# Altium PCB ups_lead_acid_electgpl_v1.0(1).PcbDoc (part 2 of 2)
Units mm, origin at the board's own origin, x right, y up, seen from the top; angles counter-clockwise.
Board outline 152.4 x 101.6 mm, 18 copper layers (F.Cu, F.Mask, B.Cu, B.Mask, F.SilkS, B.SilkS, F.Adhes, B.Adhes, F.Paste, B.Paste, Dwgs.User, Cmts.User, Eco1.User, Eco2.User, Edge.Cuts, Margin, B.CrtYd, F.CrtYd); 78 components, 42 nets, 240 pads, 288 vias.
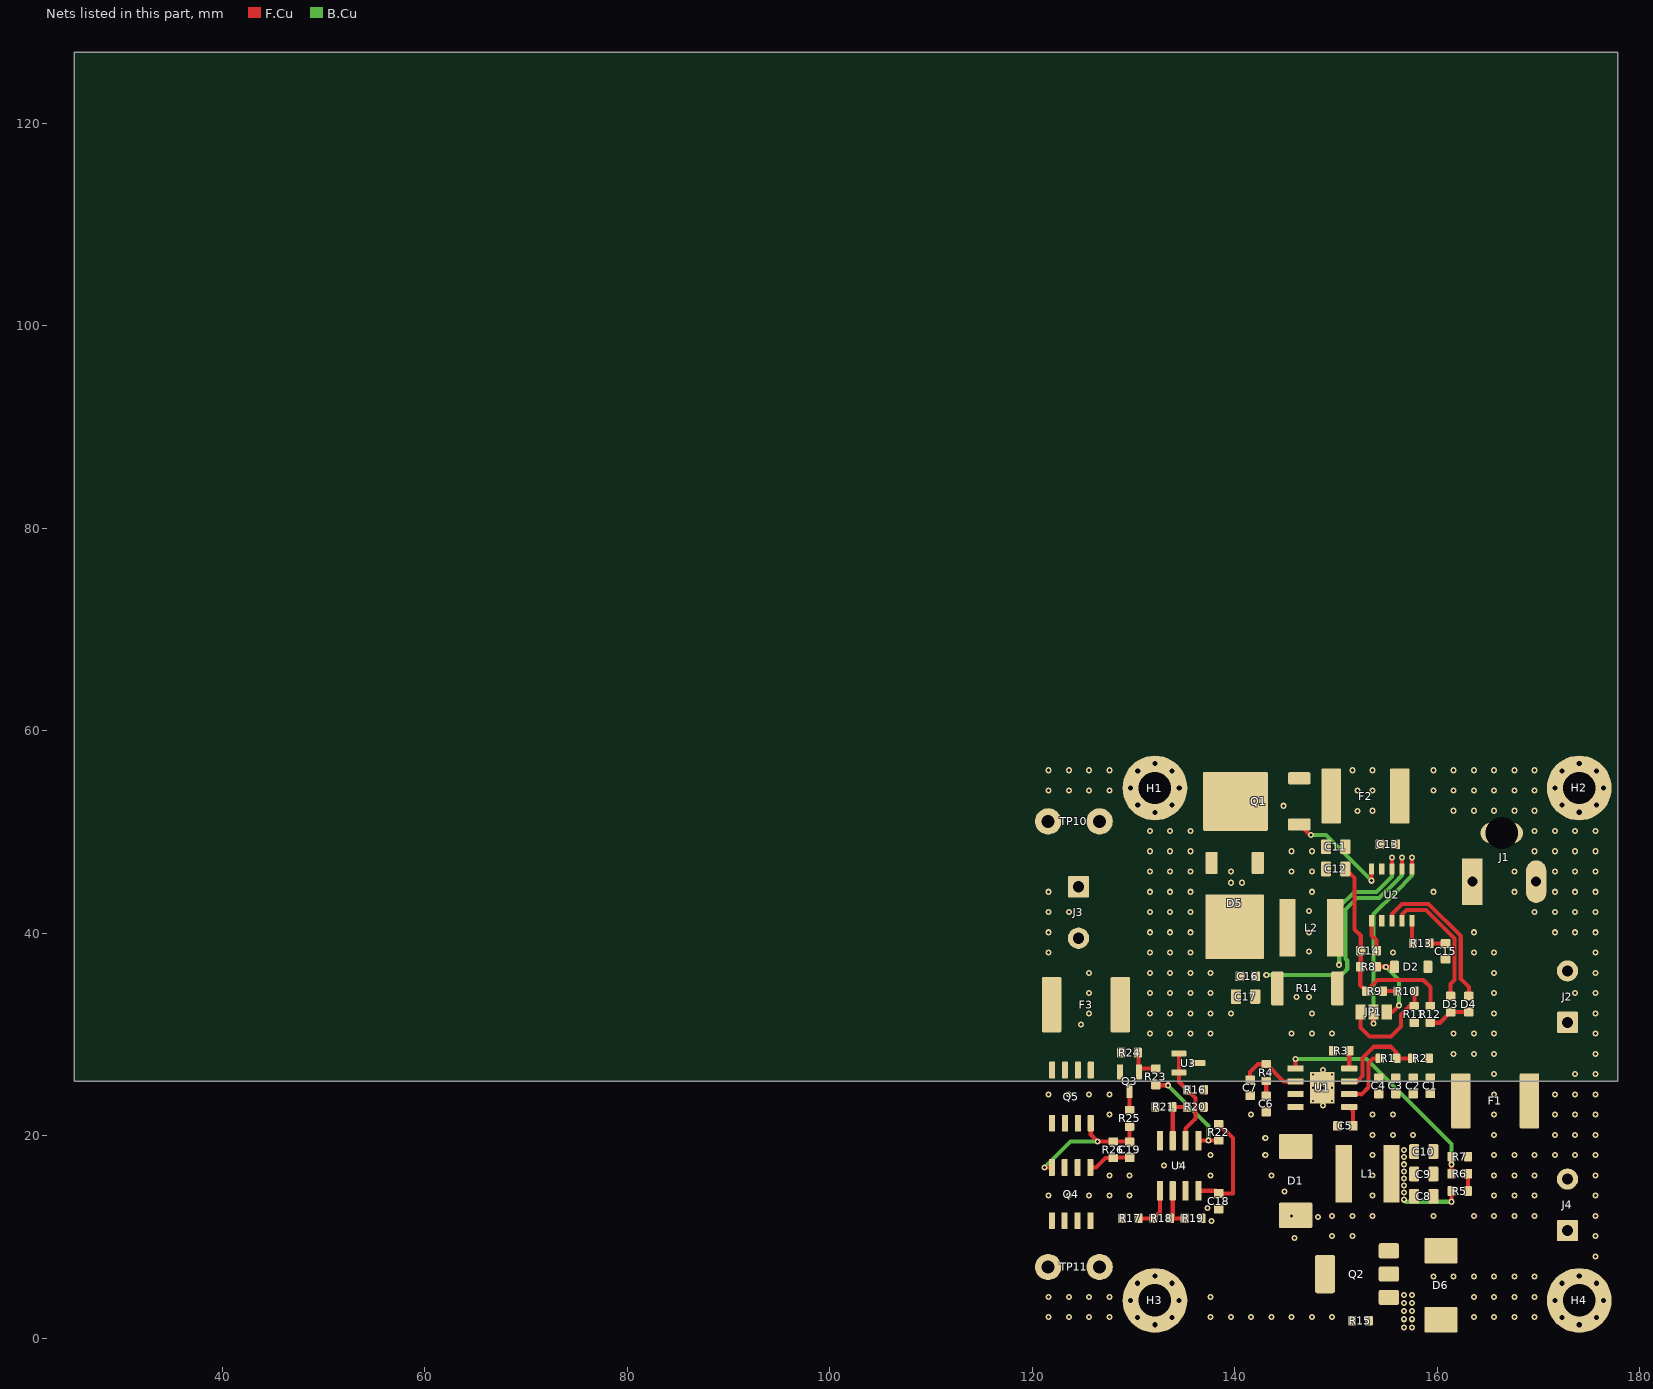
[diagram p8: the nets of this part, all layers, seen from the top]

## Part data (continued)
L1 L2: library part L_Taiyo-Yuden_NR-60xx, "Inductor, Taiyo Yuden, NR series, Taiyo-Yuden_NR-60xx, 6.0mmx6.0mm", LCSC=C360734, MFR P/N=VLS6045EX-100M, ki_fp_filters="Choke_* *Coil* Inductor_* L_*"
  L1: Description="Inductor with ferrite core", Absolute minimum=5A, Reference MFG P/N=C2849537
  L2: Internal P/N=L10U-10-12_12_6
Q1: library part TO-252-2, "TO-252/DPAK SMD package, http://www.infineon.com/cms/en/product/packages/PG-TO252/PG-TO252-3-1/", LCSC=C397952, MFR P/N=DMP4051LK3-13, Datasheet=http://www.jaolen.com/images/pdf/QM6015D.pdf, Description="-35A Id, -60V Vds, P-Channel Power MOSFET, 25mOhm Ron, 25.0nC Qg (typ), TO252", ki_fp_filters=TO?252*
Q2: library part SOT-223-3_TabPin2, "module CMS SOT223 4 pins", LCSC Part=C154901, LCSC=C558214, MFR P/N=NTF6P02T3G-VB, Datasheet=https://www.lcsc.com/datasheet/lcsc_datasheet_1808280023_Diodes-Incorporated-DMP6023LE-13_C154901.pdf, Description="60V 2W 28mΩ@10V,5A 3V@250uA 1 Piece P-Channel SOT-223-4 MOSFETs ROHS"
Q3: library part SOT-23, "SOT, 3 Pin (JEDEC TO-236 Var AB https://www.jedec.org/document_search?search_api_views_fulltext=TO-236), generated with kicad-footprint-generator ipc_gullwing_generator.py", LCSC=C65189, MFR P/N=2N7002,215, Datasheet=https://www.onsemi.com/pub/Collateral/NDS7002A-D.PDF, Description="0.115A Id, 60V Vds, N-Channel MOSFET, SOT-23", ki_fp_filters=SOT?23*
Q4 Q5: library part SOP-8_3.9x4.9mm_P1.27mm, "SOP, 8 Pin (http://www.macronix.com/Lists/Datasheet/Attachments/7534/MX25R3235F,%20Wide%20Range,%2032Mb,%20v1.6.pdf#page=79), generated with kicad-footprint-generator ipc_gullwing_generator.py", LCSC=C2841482, MFR P/N=AO4407A, Datasheet=http://www.infineon.com/dgdl/irf7404.pdf?fileId=5546d462533600a4015355fa2b5b1b9e, Description="-6.7A Id, -20V Vds, P-Channel HEXFET Power MOSFET, SO-8", ki_fp_filters=SOIC*3.9x4.9mm*P1.27mm*
R1: library part R_0603_1608Metric, "Resistor SMD 0603 (1608 Metric), square (rectangular) end terminal, IPC-7351 nominal, (Body size source: IPC-SM-782 page 72, https://www.pcb-3d.com/wordpress/wp-content/uploads/ipc-sm-782a_amendment_1_and_2.pdf), generated with kicad-footprint-generator", LCSC=C23175, MFR P/N=0603WAF4423T5E, Description="Resistor, small US symbol", Absolute minimum="442k 0402", Reference MFG P/N=C3016035, ki_fp_filters=R_*
R2: library part R_0603_1608Metric, "Resistor SMD 0603 (1608 Metric), square (rectangular) end terminal, IPC-7351 nominal, (Body size source: IPC-SM-782 page 72, https://www.pcb-3d.com/wordpress/wp-content/uploads/ipc-sm-782a_amendment_1_and_2.pdf), generated with kicad-footprint-generator", LCSC=C2930136, MFR P/N=FRC0603F9092TS, Description="Resistor, small US symbol", Absolute minimum="90k9 0402", Reference MFG P/N=C26989, ki_fp_filters=R_*
R3: library part R_0603_1608Metric, "Resistor SMD 0603 (1608 Metric), square (rectangular) end terminal, IPC-7351 nominal, (Body size source: IPC-SM-782 page 72, https://www.pcb-3d.com/wordpress/wp-content/uploads/ipc-sm-782a_amendment_1_and_2.pdf), generated with kicad-footprint-generator", LCSC=C7467321, MFR P/N=FRC0603F2433TS, Description="Resistor, small US symbol", Absolute minimum="243k 0402", Reference MFG P/N=C2998149, ki_fp_filters=R_*
R4: library part R_0603_1608Metric, "Resistor SMD 0603 (1608 Metric), square (rectangular) end terminal, IPC-7351 nominal, (Body size source: IPC-SM-782 page 72, https://www.pcb-3d.com/wordpress/wp-content/uploads/ipc-sm-782a_amendment_1_and_2.pdf), generated with kicad-footprint-generator", LCSC=C2933158, MFR P/N=FRC0603F1692TS, Description="Resistor, small US symbol", Absolute minimum="16k9 0402", Reference MFG P/N=C2929989, ki_fp_filters=R_*
R5: library part R_0603_1608Metric, "Resistor SMD 0603 (1608 Metric), square (rectangular) end terminal, IPC-7351 nominal, (Body size source: IPC-SM-782 page 72, https://www.pcb-3d.com/wordpress/wp-content/uploads/ipc-sm-782a_amendment_1_and_2.pdf), generated with kicad-footprint-generator", LCSC=C2930110, MFR P/N=FRC0603F49R9TS, Description="Resistor, small US symbol", Absolute minimum="49R9 0402", Reference MFG P/N=C25120, ki_fp_filters=R_*
R6: library part R_0603_1608Metric, "Resistor SMD 0603 (1608 Metric), square (rectangular) end terminal, IPC-7351 nominal, (Body size source: IPC-SM-782 page 72, https://www.pcb-3d.com/wordpress/wp-content/uploads/ipc-sm-782a_amendment_1_and_2.pdf), generated with kicad-footprint-generator", LCSC=C2907153, MFR P/N="FRC0603J333 TS", Description="Resistor, small US symbol", Absolute minimum="53k6 0402", Reference MFG P/N=C5153961, ki_fp_filters=R_*
R7: library part R_0603_1608Metric, "Resistor SMD 0603 (1608 Metric), square (rectangular) end terminal, IPC-7351 nominal, (Body size source: IPC-SM-782 page 72, https://www.pcb-3d.com/wordpress/wp-content/uploads/ipc-sm-782a_amendment_1_and_2.pdf), generated with kicad-footprint-generator", LCSC=C2907117, MFR P/N="FRC0603J222 TS", Description="Resistor, small US symbol", Absolute minimum="10k2 0402", Reference MFG P/N=C3015976, ki_fp_filters=R_*
R8 R11: library part R_0603_1608Metric, "Resistor SMD 0603 (1608 Metric), square (rectangular) end terminal, IPC-7351 nominal, (Body size source: IPC-SM-782 page 72, https://www.pcb-3d.com/wordpress/wp-content/uploads/ipc-sm-782a_amendment_1_and_2.pdf), generated with kicad-footprint-generator", LCSC=C2907088, MFR P/N="FRC0603J104 TS", Internal P/N=R100K-0603-1, ki_fp_filters=R_*
  R11: Aux=Rc
R9: library part R_0603_1608Metric, "Resistor SMD 0603 (1608 Metric), square (rectangular) end terminal, IPC-7351 nominal, (Body size source: IPC-SM-782 page 72, https://www.pcb-3d.com/wordpress/wp-content/uploads/ipc-sm-782a_amendment_1_and_2.pdf), generated with kicad-footprint-generator", LCSC=C2907003, MFR P/N=FRC0603F1004TS, Aux=Ra, Internal P/N=R1M-0603-1, ki_fp_filters=R_*
R10: library part R_0603_1608Metric, "Resistor SMD 0603 (1608 Metric), square (rectangular) end terminal, IPC-7351 nominal, (Body size source: IPC-SM-782 page 72, https://www.pcb-3d.com/wordpress/wp-content/uploads/ipc-sm-782a_amendment_1_and_2.pdf), generated with kicad-footprint-generator", LCSC=C2907029, MFR P/N=FRC0603F3603TS, Aux=Rb, Internal P/N=R360K-0603-1, ki_fp_filters=R_*
R12 R16 R22 R23 R24 R26: library part R_0603_1608Metric, "Resistor SMD 0603 (1608 Metric), square (rectangular) end terminal, IPC-7351 nominal, (Body size source: IPC-SM-782 page 72, https://www.pcb-3d.com/wordpress/wp-content/uploads/ipc-sm-782a_amendment_1_and_2.pdf), generated with kicad-footprint-generator", LCSC=C2930027, MFR P/N="FRC0603J103 TS", ki_fp_filters=R_*
  R12: Internal P/N=R10K-0603-1
  R16 R22 R23 R24 R26: Description="Resistor, small US symbol"
R13: library part R_0603_1608Metric, "Resistor SMD 0603 (1608 Metric), square (rectangular) end terminal, IPC-7351 nominal, (Body size source: IPC-SM-782 page 72, https://www.pcb-3d.com/wordpress/wp-content/uploads/ipc-sm-782a_amendment_1_and_2.pdf), generated with kicad-footprint-generator", LCSC=C2907096, MFR P/N="FRC0603J121 TS", Internal P/N=R120-0603-1, ki_fp_filters=R_*
R14: library part R_2512_6332Metric, "Resistor SMD 2512 (6332 Metric), square (rectangular) end terminal, IPC-7351 nominal, (Body size source: IPC-SM-782 page 72, https://www.pcb-3d.com/wordpress/wp-content/uploads/ipc-sm-782a_amendment_1_and_2.pdf), generated with kicad-footprint-generator", LCSC=C875871, MFR P/N=PT2512FK-7W0R12L, Internal P/N=R0.03-2512_2W-1, ki_fp_filters=R_*
R15: library part R_0603_1608Metric, "Resistor SMD 0603 (1608 Metric), square (rectangular) end terminal, IPC-7351 nominal, (Body size source: IPC-SM-782 page 72, https://www.pcb-3d.com/wordpress/wp-content/uploads/ipc-sm-782a_amendment_1_and_2.pdf), generated with kicad-footprint-generator", LCSC Part=C99198, LCSC=C2907088, MFR P/N="FRC0603J104 TS", Description="Resistor, small US symbol", ki_fp_filters=R_*
R17 R18 R19: library part R_0603_1608Metric, "Resistor SMD 0603 (1608 Metric), square (rectangular) end terminal, IPC-7351 nominal, (Body size source: IPC-SM-782 page 72, https://www.pcb-3d.com/wordpress/wp-content/uploads/ipc-sm-782a_amendment_1_and_2.pdf), generated with kicad-footprint-generator", LCSC=C2907042, MFR P/N=FRC0603F4702TS, Description="Resistor, small US symbol", ki_fp_filters=R_*
R20: library part R_0603_1608Metric, "Resistor SMD 0603 (1608 Metric), square (rectangular) end terminal, IPC-7351 nominal, (Body size source: IPC-SM-782 page 72, https://www.pcb-3d.com/wordpress/wp-content/uploads/ipc-sm-782a_amendment_1_and_2.pdf), generated with kicad-footprint-generator", LCSC=C2906995, MFR P/N=FRC0603F1502TS, Description="Resistor, small US symbol", ki_fp_filters=R_*
R21: library part R_0603_1608Metric, "Resistor SMD 0603 (1608 Metric), square (rectangular) end terminal, IPC-7351 nominal, (Body size source: IPC-SM-782 page 72, https://www.pcb-3d.com/wordpress/wp-content/uploads/ipc-sm-782a_amendment_1_and_2.pdf), generated with kicad-footprint-generator", LCSC=C2907166, MFR P/N="FRC0603J472 TS", Description="Resistor, small US symbol", ki_fp_filters=R_*
R25: library part R_0603_1608Metric, "Resistor SMD 0603 (1608 Metric), square (rectangular) end terminal, IPC-7351 nominal, (Body size source: IPC-SM-782 page 72, https://www.pcb-3d.com/wordpress/wp-content/uploads/ipc-sm-782a_amendment_1_and_2.pdf), generated with kicad-footprint-generator", LCSC=C2907091, MFR P/N="FRC0603J100 TS", Description="Resistor, small US symbol", ki_fp_filters=R_*
REF**: library part Symbol_Barrel_Polarity, "Barrel connector polarity indicator"
TP10 TP11: library part TestPoint_Bridge_Pitch5.08mm_Drill1.3mm, "wire loop as test point, pitch 5.08mm, hole diameter 1.3mm, wire diameter 1.0mm", Description="test point (alternative shape)", ki_fp_filters="Pin* Test*"
U1: library part HSOP-8-1EP_3.9x4.9mm_P1.27mm_EP2.41x3.1mm_ThermalVias, "HSOP, 8 Pin (https://www.st.com/resource/en/datasheet/l5973d.pdf), generated with kicad-footprint-generator ipc_gullwing_generator.py", LCSC=C44377, MFR P/N=TPS54360DDAR, Datasheet=http://www.ti.com/lit/ds/symlink/tps54360.pdf, Description="3.5A, Step Down DC-DC Converter with Eco-mode, 4.5-60V Input Voltage, PowerSO-8", Absolute minimum=TPS54360DDA, Reference MFG P/N=C44377, ki_fp_filters=TI*SO*PowerPAD*ThermalVias*
U2: library part SSOP-10_3.9x4.9mm_P1.00mm, "10-Lead SSOP, 3.9 x 4.9mm body, 1.00mm pitch (http://www.st.com/resource/en/datasheet/viper01.pdf)", MFR P/N=CN3767, LCSC=C81968
U3: library part SOT-23, "SOT, 3 Pin (JEDEC TO-236 Var AB https://www.jedec.org/document_search?search_api_views_fulltext=TO-236), generated with kicad-footprint-generator ipc_gullwing_generator.py", LCSC=C23892, MFR P/N=TL431AIDBZR, Datasheet=http://www.ti.com/lit/ds/symlink/tl431.pdf, Description="Shunt Regulator, SOT-23", ki_fp_filters=SOT?23*
U4: library part SOIC-8_3.9x4.9mm_P1.27mm, "SOIC, 8 Pin (JEDEC MS-012AA, https://www.analog.com/media/en/package-pcb-resources/package/pkg_pdf/soic_narrow-r/r_8.pdf), generated with kicad-footprint-generator ipc_gullwing_generator.py", LCSC=C67470, MFR P/N=LM393DR, Datasheet=http://www.ti.com/lit/ds/symlink/lm393.pdf, Description="Low-Power, Low-Offset Voltage, Dual Comparators, DIP-8/SOIC-8/TO-99-8", ki_fp_filters="SOIC*3.9x4.9mm*P1.27mm* DIP*W7.62mm* SOP*5.28x5.23mm*P1.27mm* VSSOP*3x3mm*P0.65mm* TSSOP*4.4x3mm*P0.65mm*"

## Via types
v1: diameter 0.6, hole 0.3, F.Cu to B.Cu, tented both sides, 288 vias

## Nets (pads, with @x,y where several pads share a name; then routed paths per layer and width w, separated by ;. In a path a pad name is that pad's centre, name@x,y a point inside that pad or via, vN(x,y) a via of type N, cw(c..) or ccw(c..) an arc to the next point about the centre after c; other vN are vias at no path point)
+12V: C8.2 C9.2 C10.2 D6.2 L1.2 Q2.1 R5.1 R15.2 | length 5.9
  F.Cu w0.406: R5.1@161.375,14.558 161.375,13.525 v1(161.4,13.5)
  B.Cu w0.406: v1(156.7,13.7) 156.9,13.5 v1(161.4,13.5)
  other v1: 156.7,1.1 157.5,1.1 156.7,1.9 157.5,1.9 156.7,2.7 157.5,2.7 156.7,3.5 157.5,3.5 156.7,4.3 157.5,4.3 156.7,14.4 156.7,15.1 156.7,15.8 156.7,16.5 156.7,17.2 156.7,17.9 156.7,18.6
BAT+: F3.1 J3.1 TP10.1
GND: C1.1 C2.1 C3.1 C4.1 C6.2 C7.2 C8.1 C9.1 C10.1 C11.2 C12.2 C13.2 C15.2 C16.2 C17.2 C18.2 D1.2 D2.2 D5.3 H1.1 H2.1 H3.1 H4.1 J1.2 J2.2 J3.2 J4.2 Q3.2 R2.2 R3.2 R7.2 R11.2 R15.1 R19.2 R21.2 R24.2 TP11.1 U1.7 U1.9 U2.2 U3.3 U4.4
  other v1: 121.6,2.108 123.6,2.108 125.6,2.108 127.6,2.108 137.6,2.108 139.6,2.108 141.6,2.108 143.6,2.108 145.6,2.108 147.6,2.108 149.6,2.108 163.6,2.108 165.6,2.108 167.6,2.108 169.6,2.108 121.6,4.108 123.6,4.108 125.6,4.108 127.6,4.108 131.6,4.108 137.6,4.108 163.6,4.108 165.6,4.108 167.6,4.108 169.6,4.108 173.6,4.108 159.6,6.108 161.6,6.108 163.6,6.108 165.6,6.108 167.6,6.108 169.6,6.108 175.6,8.108 145.9,9.9 149.6,10.108 151.6,10.108 175.6,10.108 137.7,11.6 148.2,12 145.6,12.108 149.6,12.108 151.6,12.108 153.6,12.108 159.6,12.108 163.6,12.108 165.6,12.108 167.6,12.108 169.6,12.108 175.6,12.108 137.3,12.9 121.6,14.108 123.6,14.108 125.6,14.108 127.6,14.108 129.6,14.108 153.6,14.108 165.6,14.108 167.6,14.108 169.6,14.108 175.6,14.108 144.9,14.5 127.6,16.108 129.6,16.108 137.6,16.108 143.6,16.108 153.6,16.108 165.6,16.108 167.6,16.108 169.6,16.108 175.6,16.108 133,17.1 134.5,17.1 137.6,18.107 143,18.1 153.6,18.107 165.6,18.107 167.6,18.107 169.6,18.107 171.6,18.107 173.6,18.107 175.6,18.107 143,19.8 153.6,20.108 155.6,20.108 157.6,20.108 165.6,20.108 171.6,20.108 173.6,20.108 175.6,20.108 127.6,22.108 141.6,22.108 153.6,22.108 155.6,22.108 165.6,22.108 171.6,22.108 173.6,22.108 175.6,22.108 148.7,23 121.6,24.108 123.6,24.108 125.6,24.108 127.6,24.108 165.6,24.108 171.6,24.108 173.6,24.108 175.6,24.108 148.645,24.758 165.6,26.108 173.6,26.108 175.6,26.108 148.7,26.5 161.6,28.108 163.6,28.108 165.6,28.108 175.6,28.108 131.6,30.108 133.6,30.108 135.6,30.108 137.6,30.108 145.6,30.108 147.6,30.108 149.6,30.108 161.6,30.108 163.6,30.108 165.6,30.108 175.6,30.108 124.8,31 125.6,32.107 131.6,32.107 133.6,32.107 135.6,32.107 137.6,32.107 139.6,32.107 147.6,32.107 165.6,32.107 175.6,32.107 146.1,33.7 147.3,33.7 125.6,34.108 131.6,34.108 133.6,34.108 135.6,34.108 137.6,34.108 165.6,34.108 173.6,34.108 175.6,34.108 125.6,36.108 131.6,36.108 133.6,36.108 135.6,36.108 137.6,36.108 165.6,36.108 175.6,36.108 121.6,38.108 131.6,38.108 133.6,38.108 135.6,38.108 155.6,38.108 163.6,38.108 165.6,38.108 175.6,38.108 147.3,38.2 121.6,40.108 131.6,40.108 133.6,40.108 135.6,40.108 147.3,40.1 163.6,40.108 171.6,40.108 173.6,40.108 175.6,40.108 121.6,42.108 123.6,42.108 131.6,42.108 133.6,42.108 135.6,42.108 169.6,42.108 171.6,42.108 173.6,42.108 175.6,42.108 147.3,42.2 121.6,44.108 131.6,44.108 133.6,44.108 135.6,44.108 147.6,44.108 159.6,44.108 167.6,44.108 171.6,44.108 173.6,44.108 175.6,44.108 139.6,45 140.7,45 131.6,46.107 133.6,46.107 135.6,46.107 139.6,46.107 145.6,46.107 147.6,46.107 167.6,46.107 171.6,46.107 173.6,46.107 175.6,46.107 131.6,48.108 133.6,48.108 135.6,48.108 145.6,48.108 147.6,48.108 169.6,48.108 171.6,48.108 173.6,48.108 175.6,48.108 131.6,50.108 133.6,50.108 135.6,50.108 169.6,50.108 171.6,50.108 173.6,50.108 175.6,50.108 152.1,52.1 153.6,52.108 161.6,52.108 163.6,52.108 165.6,52.108 167.6,52.108 169.6,52.108 144.8,52.6 121.6,54.108 123.6,54.108 125.6,54.108 127.6,54.108 131.6,54.108 152.1,54.1 153.6,54.108 159.6,54.108 161.6,54.108 163.6,54.108 165.6,54.108 167.6,54.108 169.6,54.108 173.6,54.108 121.6,56.108 123.6,56.108 125.6,56.108 127.6,56.108 151.6,56.108 153.6,56.108 159.6,56.108 161.6,56.108 163.6,56.108 165.6,56.108 167.6,56.108 169.6,56.108
Net-(C6-Pad1): C6.1 R4.2 | length 1.5
  F.Cu w0.406: C6.1@143.1,23.932 R4.2@143.1,25.433
Net-(C15-Pad1): C15.1 R13.2 | length 1.6
  F.Cu w0.406: R13.2@159.225,39.033 159.25,39.008 C15.1@160.8,39.008
Net-(C19-Pad2): C19.2 Q4.1 Q4.2 Q4.3 Q5.1 Q5.2 Q5.3 R26.2 | length 4.3
  F.Cu w0.406: Q4.1@125.735,16.883 126.283,16.883 127.208,17.808 R26.2@128,17.808 128.05,17.858 C19.2@129.6,17.858
Net-(D1-K): C5.2 D1.1 L1.1 U1.8
Net-(D2-K): D2.1 JP1.3 R8.2 | length 7.5
  F.Cu w0.406: R8.2@154.025,36.7 v1(154.9,36.7) D2.1@155.75,36.7 ; JP1.3@155,32.243 155.543,32.243 v1(156.2,32.9)
  B.Cu w0.406: v1(154.9,36.7) 156.2,35.4 v1(156.2,32.9)
Net-(D3-A): D3.2 D4.2 R12.2 | length 4.2
  F.Cu w0.406: R12.2@159.3,31.175 160.25,31.175 D3.2@161.3,32.225 D4.2@163.1,32.225
Net-(D3-K): D3.1 U2.4 | length 13
  F.Cu w0.406: U2.4@156.5,41.25 156.5,41.863 156.937,42.3 158.879,42.3 161.7,39.479 161.7,35.4 161.3,35 D3.1@161.3,33.8
Net-(D4-K): D4.1 U2.3 | length 15.4
  F.Cu w0.406: U2.3@155.5,41.25 155.5,41.9 156.507,42.907 159.13,42.907 162.307,39.73 162.307,35.493 163.1,34.7 D4.1@163.1,33.8
Net-(D5-K): D5.2 L2.1
Net-(F3-Pad2): F3.2 Q5.5 Q5.6 Q5.7 Q5.8
Net-(JP1-A): JP1.1 R10.2 R11.1 | length 10.7
  F.Cu w0.406: JP1.1@152.4,32.243 152.4,30.7 153.3,29.8 155.4,29.8 156.4,30.8 156.4,32 157.225,32.825 R11.1@157.7,32.825 157.725,32.85 R10.2@157.725,34.3
Net-(JP1-C): JP1.2 U2.6 | length 20.3
  F.Cu w0.406: v1(153.7,31.1) JP1.2@153.7,32.243 ; U2.6@157.5,46.35 v1(157.5,47.5)
  B.Cu w0.406: v1(153.7,31.1) 153.7,41.9 155.9,44.1 157.5,45.7 v1(157.5,47.5)
Net-(Q1-D): D5.1 Q1.2
Net-(Q1-G): Q1.1 U2.10 | length 10.6
  F.Cu w0.406: Q1.1@146.358,50.75 147.408,49.7 v1(147.5,49.7) ; v1(153.5,45.2) U2.10@153.5,46.35
  B.Cu w0.406: v1(147.5,49.7) 149,49.7 v1(153.5,45.2)
Net-(Q1-S): C11.1 C12.1 C13.1 C14.1 F2.2 Q1.3 R8.1 R9.1 R12.1 U2.9 | length 21.9
  F.Cu w0.406: C12.1@150.9,46.358 151.8,45.458 151.8,40.4 152.425,39.775 C14.1@152.425,38.3 152.425,36.75 R8.1@152.375,36.7 152.375,34.9 R9.1@152.975,34.3 154.075,35.4 158.6,35.4 159.3,34.7 R12.1@159.3,32.825
Net-(Q3-D): Q3.3 R25.2 | length 1.9
  F.Cu w0.406: R25.2@129.6,22.558 Q3.3@129.6,24.458
Net-(Q3-G): Q3.1 R23.2 R24.1 | length 3.8
  F.Cu w0.406: R24.1@130.425,28.233 130.5,28.158 130.5,26.333 130.825,26.658 R23.2@132.2,26.658
Net-(Q4-G): C19.1 Q4.4 Q5.4 R25.1 R26.1 | length 13.8
  F.Cu w0.406: v1(121.2,16.9) 121.217,16.883 Q4.4@121.925,16.883 ; Q5.4@125.77,21.257 125.77,20.13 v1(126.443,19.458) R26.1@128,19.457 129.55,19.458 C19.1@129.6,19.407 R25.1@129.6,20.908
  B.Cu w0.406: v1(121.2,16.9) 123.757,19.458 v1(126.443,19.458)
Net-(R5-Pad2): R5.2 R6.1 | length 1.7
  F.Cu w0.406: R5.2@163.025,14.558 R6.1@163.025,16.258
Net-(R10-Pad1): R9.2 R10.1 | length 1.4
  F.Cu w0.406: R9.2@154.625,34.3 R10.1@156.075,34.3
Net-(R22-Pad2): R22.2 R23.1 U4.1 | length 10.3
  F.Cu w0.406: R23.1@132.2,25.008 132.208,25 v1(133.4,25) ; U4.1@136.405,19.533 v1(137.4,19.533) R22.2@138.4,19.533
  B.Cu w0.406: v1(133.4,25) 137.4,21 v1(137.4,19.533)
Net-(U1-BOOT): C5.1 U1.1 | length 2
  F.Cu w0.406: U1.1@151.295,22.853 151.675,22.473 C5.1@151.675,21
Net-(U1-COMP): C7.1 R4.1 U1.6 | length 6.3
  F.Cu w0.406: C7.1@141.5,25.533 141.5,26.3 142.282,27.083 R4.1@143.1,27.083 143.117,27.083 144.808,25.393 U1.6@145.995,25.393
Net-(U1-EN): R1.2 R2.1 U1.3 | length 9.5
  F.Cu w0.406: U1.3@151.295,25.393 152.092,25.393 152.6,25.9 152.6,27.7 153.7,28.8 155.4,28.8 155.95,28.25 R1.2@155.95,27.658 R2.1@157.5,27.658
Net-(U1-FB): R6.2 R7.1 U1.5 | length 23.5
  F.Cu w0.406: U1.5@145.995,26.663 146,26.668 v1(146,27.6) ; R6.2@161.375,16.258 v1(161.375,17.2) R7.1@161.375,17.958
  B.Cu w0.406: v1(146,27.6) 153,27.6 161.4,19.2 161.4,17.225 v1(161.375,17.2)
Net-(U1-RT{slash}CLK): R3.1 U1.4 | length 1.7
  F.Cu w0.406: U1.4@151.295,26.663 151.295,28.37 R3.1@151.325,28.4
Net-(U1-VIN): C1.2 C2.2 C3.2 C4.2 F1.2 R1.1 U1.2 | length 5.9
  F.Cu w0.406: U1.2@151.295,24.123 152.478,24.123 152.5,24.1 153.207,24.807 153.207,27.207 153.658,27.658 R1.1@154.3,27.658
Net-(U2-COM): R13.1 U2.5 | length 2.2
  F.Cu w0.406: U2.5@157.5,41.25 157.5,39.108 R13.1@157.575,39.033
Net-(U2-CSP): L2.2 R14.1 U2.8 | length 15.2
  F.Cu w0.406: U2.8@155.5,46.35 v1(155.5,47.5)
  B.Cu w0.406: v1(150.3,36.9) 150.3,42.6 151.8,44.1 154,44.1 155.5,45.6 v1(155.5,47.5)
Net-(U2-VG): C14.2 U2.1 | length 3.1
  F.Cu w0.406: U2.1@153.5,41.25 153.5,39.8 153.975,39.325 C14.2@153.975,38.3
Net-(U3-K): R16.2 U3.1 U3.2 U4.2 | length 9.7
  F.Cu w0.406: U3.1@134.463,28.15 U3.2@134.463,26.25 134.462,25.338 134.5,25.3 134.532,25.3 R16.2@135.275,24.558 136.1,23.733 136.1,21.7 135.135,20.735 U4.2@135.135,19.533
Net-(U4A-+): R20.2 R21.1 U4.3 | length 4.8
  F.Cu w0.406: U4.3@133.865,19.533 133.865,22.818 R21.1@133.825,22.858 R20.2@135.275,22.858
Net-(U4B-+): R17.2 R18.1 U4.5 | length 4.4
  F.Cu w0.406: R17.2@130.5,11.858 R18.1@131.95,11.858 132.595,12.503 U4.5@132.595,14.583
Net-(U4B--): R18.2 R19.1 U4.6 | length 4.3
  F.Cu w0.406: U4.6@133.865,14.583 133.865,12.123 R18.2@133.6,11.858 R19.1@135.05,11.858
OUTBP: D6.1 J4.1 Q2.3
P+: C16.1 C17.1 C18.1 Q2.2 Q4.5 Q4.6 Q4.7 Q4.8 R14.2 R16.1 R17.1 R20.1 R22.1 U2.7 U4.8 | length 35
  F.Cu w0.406: U4.8@136.405,14.583 138.15,14.583 C18.1@138.4,14.333 139.8,14.333 139.8,19.783 R22.1@138.4,21.183 ; U2.7@156.5,46.35 v1(156.5,47.5)
  B.Cu w0.406: v1(143.1,35.9) 150.5,35.9 151,36.4 151.1,36.5 151.1,37.307 150.907,37.5 150.907,38.4 150.907,42.348 151.179,42.621 152.052,43.493 152.8,43.493 154.252,43.493 155.752,44.993 156.5,45.741 v1(156.5,47.5)
unconnected-(J1-Pad3): J1.3
unconnected-(U4-Pad7): U4.7
VIN: F1.1 F2.1 J1.1 J2.1
pads on no net: D5.Un1 D5.Un2 D5.Un3 D5.Un4 Q1.Un1 Q1.Un2 Q1.Un3 Q1.Un4 U1.Un1 U1.Un2 U1.Un3 U1.Un4
copper on no net: | length 470.2
  F.SilkS w0.254: 119.7,9.658 137.9,9.658 140.05,11.807 ; 119.7,29.358 137.9,29.358 140.05,27.208 ; 136.1,58.058 136.1,35.458 142.2,29.358 ; 147.5,0.058 147.5,9.568 148.6,10.668 163.2,10.668 164.41,9.458 164.4,0.058 ; 153.8,29.4 153.8,30.9 ; 158.9,58.058 158.9,42.658 164.5,37.058 164.5,30.158 163.7,29.358 ; 140.05,11.807 141.2,10.658 163.2,10.658 164.5,11.968 164.5,15.758 164.5,27.758 164.5,28.558 163.7,29.358 ; 140.05,11.807 140.05,27.208 ; 140.05,27.208 142.2,29.358 ; 142.2,29.358 162.9,29.358 163.7,29.358 ; 150.7,29.4 150.7,30.7 150.7,30.9 156.8,30.9 156.8,29.4 150.7,29.4
  Edge.Cuts w0.254: 119.7,2.058 ccw(c121.7,2.057) 121.7,0.058 175.7,0.058 ccw(c175.7,2.057) 177.7,2.058 177.7,56.058 ccw(c175.7,56.058) 175.7,58.058 121.7,58.058 ccw(c121.7,56.058) 119.7,56.058 119.7,2.058

## Polygon pours and split planes (outlines as drawn)
GND on F.Cu "F.Cu-GND" (solid, remove dead copper, pour order 37): 119.7,58 177.7,58 177.8,57.9 177.8,0 119.7,0 119.6,0.1 119.6,57.9
VIN on F.Cu "F.Cu-/Buck/VIN-2" (solid, remove dead copper, pour order 32): 168.2,31.1 169.3,32.2 173.5,32.2 173.8,31.9 173.8,29.4 170.7,26.3 170.7,21.6 169.9,20.8 168.5,20.8 168.2,21.1
Net-(U2-CSP) on F.Cu "F.Cu-Net-(U2-CSP)" (solid, remove dead copper, pour order 31): 149.1,43.4 150.7,43.4 150.8,43.3 150.8,33.1 150.5,32.8 149.6,32.8 148.4,34 148.4,42.7
P+ on F.Cu "F.Cu-/Battery Protect/P+-1" (solid, remove dead copper, pour order 30): 156,5.8 156,7 155.9,7.1 151.6,7.1 150.5,8.2 140,8.2 137.9,10.3 131,10.3 129,12.3 121.7,12.3 121.7,10.3 122.6,9.4 128.1,9.4 129.6,7.9 135.5,7.9 138.9,4.5 150.5,4.5 151.6,5.6 155.8,5.6
+12V on F.Cu "F.Cu-+12V-1" (solid, remove dead copper, pour order 33): 154.7,13.4 154.7,19 158.1,19 158.1,13.4
+12V on F.Cu "F.Cu-+12V" (solid, remove dead copper, pour order 29): 161.9,0.8 161.9,2.8 160,4.7 153.9,4.7 153,3.8 153,1.5 153.8,0.7 161.8,0.7
VIN on F.Cu "F.Cu-/Buck/VIN-1" (solid, remove dead copper, pour order 28): 162.6,42.8 168.2,37.2 168.2,31 169,30.2 173.5,30.2 173.8,30.5 173.8,31.9 172.9,32.8 171.7,32.8 171.1,33.4 171.1,37.7 165.1,43.7 165.1,46.6 164.4,47.3 162.7,47.3 162.6,47.2
Net-(Q1-S) on F.Cu "F.Cu-Net-(Q1-S)-1" (solid, remove dead copper, pour order 27): 150.4,51 150.4,56.1 145.7,56.1 145.4,55.8 145.4,54.1 148.6,50.9 150.3,50.9
Net-(Q1-D) on F.Cu "F.Cu-Net-(Q1-D)" (solid, remove dead copper, pour order 26): 137.1,55.9 143,55.9 143.2,55.7 143.2,46.4 142.7,45.9 141.8,45.9 137.1,50.6
VIN on F.Cu "F.Cu-/Buck/VIN" (solid, remove dead copper, pour order 25): 164.4,47.3 158.7,53 158.7,55.3 157.8,56.2 155.6,56.2 155.4,56 155.4,51.2 160.7,45.9 160.7,44.7 162.6,42.8 164.3,42.8 164.4,42.9
P+ on F.Cu "F.Cu-/Battery Protect/P+" (solid, remove dead copper, pour order 24): 141.7,36.2 141.6,36.1 141.6,30.8 136.7,25.9 136.7,22.7 139.2,20.2 139.2,11.6 137.9,10.3 137.9,8.6 139.9,6.6 141.3,6.6 142.9,8.2 142.9,14.3 141.5,15.7 141.5,20.6 139.4,22.7 139.4,25.6 144.9,31.1 144.9,36.2
Net-(Q1-S) on F.Cu "F.Cu-Net-(Q1-S)" (solid, remove dead copper, pour order 23): 154.7,45.9 154.7,49.2 153.9,50 151.8,50 151.1,50.7 151.1,54.8 149.8,56.1 149.2,56.1 148.3,55.2 148.3,51.2 149.5,50 150,50 150.4,49.6 150.4,45.8 150.7,45.5 151.9,45.5 152.6,46.2 152.6,47.2 153.1,47.7 153.8,47.7 154.3,47.2 154.3,45.9
Net-(D5-K) on F.Cu "F.Cu-Net-(D5-K)" (solid, remove dead copper, pour order 36): 137.2,43.8 145.5,43.8 146,43.3 146,37.7 145.7,37.4 137.6,37.4 137.1,37.9 137.1,43.7
Net-(F3-Pad2) on F.Cu "F.Cu-Net-(F3-Pad2)" (solid, remove dead copper, pour order 35): 121.7,25.8 121.7,28.6 121,29.3 121,35.5 121.2,35.7 122.7,35.7 123.8,34.6 123.8,30.5 126,28.3 126,26 125.8,25.8
Net-(U1-VIN) on F.Cu "F.Cu-Net-(U1-VIN)" (solid, remove dead copper, pour order 22): 163.2,26.1 161.5,26.1 160,24.6 152.2,24.6 152,24.4 150.6,24.4 150.6,23.8 152,23.8 152.2,23.6 155.9,23.6 158.8,20.7 161.9,20.7 163.2,22
Net-(C19-Pad2) on F.Cu "F.Cu-Net-(C19-Pad2)" (solid, remove dead copper, pour order 21): 123,18.4 121.7,19.7 121.7,22 124.7,22 124.7,19.7 126,18.4 126,16.1 123,16.1
Net-(D1-K) on F.Cu "F.Cu-Net-(D1-K)" (solid, remove dead copper, pour order 20): 145.1,23.1 144.6,22.6 144.6,20.7 144.4,20.5 144.4,17.9 148.9,13.4 151.2,13.4 151.6,13.8 151.6,19.7 149.7,21.6 148.1,21.6 146.7,23 146.7,23.1
OUTBP on F.Cu "F.Cu-/ByPass/OUTBP" (solid, remove dead copper, pour order 19): 154.5,9.3 158.3,9.3 158.8,9.8 166.8,9.8 166.9,9.7 170,9.7 171.9,11.6 173.7,11.6 173.8,11.5 173.8,9.858 171.442,7.5 156.5,7.5 156,8 154.6,8 154.5,8.1 154.5,9.3
BAT+ on F.Cu "F.Cu-/Battery Protect/BAT+" (solid, remove dead copper, pour order 18): 129.6,30.5 129.6,49.8 127.1,52.3 121.1,52.3 120.5,51.7 120.5,47 123.9,43.6 125.4,43.6 126.5,42.5 126.5,31.2 127.5,30.2 129.3,30.2
+12V on B.Cu "B.Cu-+12V" (solid, remove dead copper, pour order 34): 155.8,19 155.8,1.2 156.2,0.8 157.7,0.8 158.1,1.2 158.1,18.8 157.8,19.1 155.9,19.1
GND on B.Cu "B.Cu-GND" (solid, remove dead copper, pour order 38): 119.7,58 177.7,58 177.8,57.9 177.8,0 119.7,0 119.6,0.1 119.6,57.9

## Other copper
F.SilkS:
  text "25V/3A Max" at 160.2,54.086 h1
  text "-" at 161.2,52.558 h1
  text "BAT+" at 119.6,52.358 h1
  text "+" at 167.2,52.129 h1
  text "For evaluation Only,  / not FCC approved for resale" at 135.308,49.9 h0.61 r90
  text "12V Lead Acid" at 132.424,47.358 h1 r90
  text "+ BAT -" at 130.9,45.258 h1 r90
  text "INPUT" at 162,42.558 h1 r90
  text "CHARGER" at 135.636,35.211 h1 r135
  text "DO" at 159.7,34.1 h1
  text "CH" at 162,34.1 h1
  text "+ VIN -" at 168,30.258 h1 r90
  text "MPPT" at 150.9,29.395 h0.61
  text "NORM" at 153.9,29.395 h0.61
  text "INPUT" at 172.6,25.958 h1
  text "12V/2A" at 171.4,19.886 h1
  text "OUPUT" at 172,18.358 h1
  text "+ OUT -" at 168,9.458 h1 r90
  text "BUCK" at 140.8,8.658 h1
  text "PROTECT" at 131.1,7.658 h1
  text "94V-0 / E479892 / JLC-2" at 169.114,4.632 h0.61 r90
  text "Electgpl" at 135.975,4.091 h1.63
  text "Lead Acid miniUPS" at 136.3,3.781 h0.61
  text "BAT-" at 119.6,3.058 h1
  text "ARGENTINA DESIGN" at 136.3,2.595 h0.61
  text "ByPass" at 148.367,1.958 h1 r90
  text "2523" at 168.569,0.976 h0.71 r90